# Altium PCB main.PcbDoc
Units mm, origin at the board's own origin, x right, y up, seen from the top; angles counter-clockwise.
Board outline 64.99 x 56 mm, 2 copper layers (Top Layer, Bottom Layer); 48 components, 52 nets, 256 pads, 78 vias.
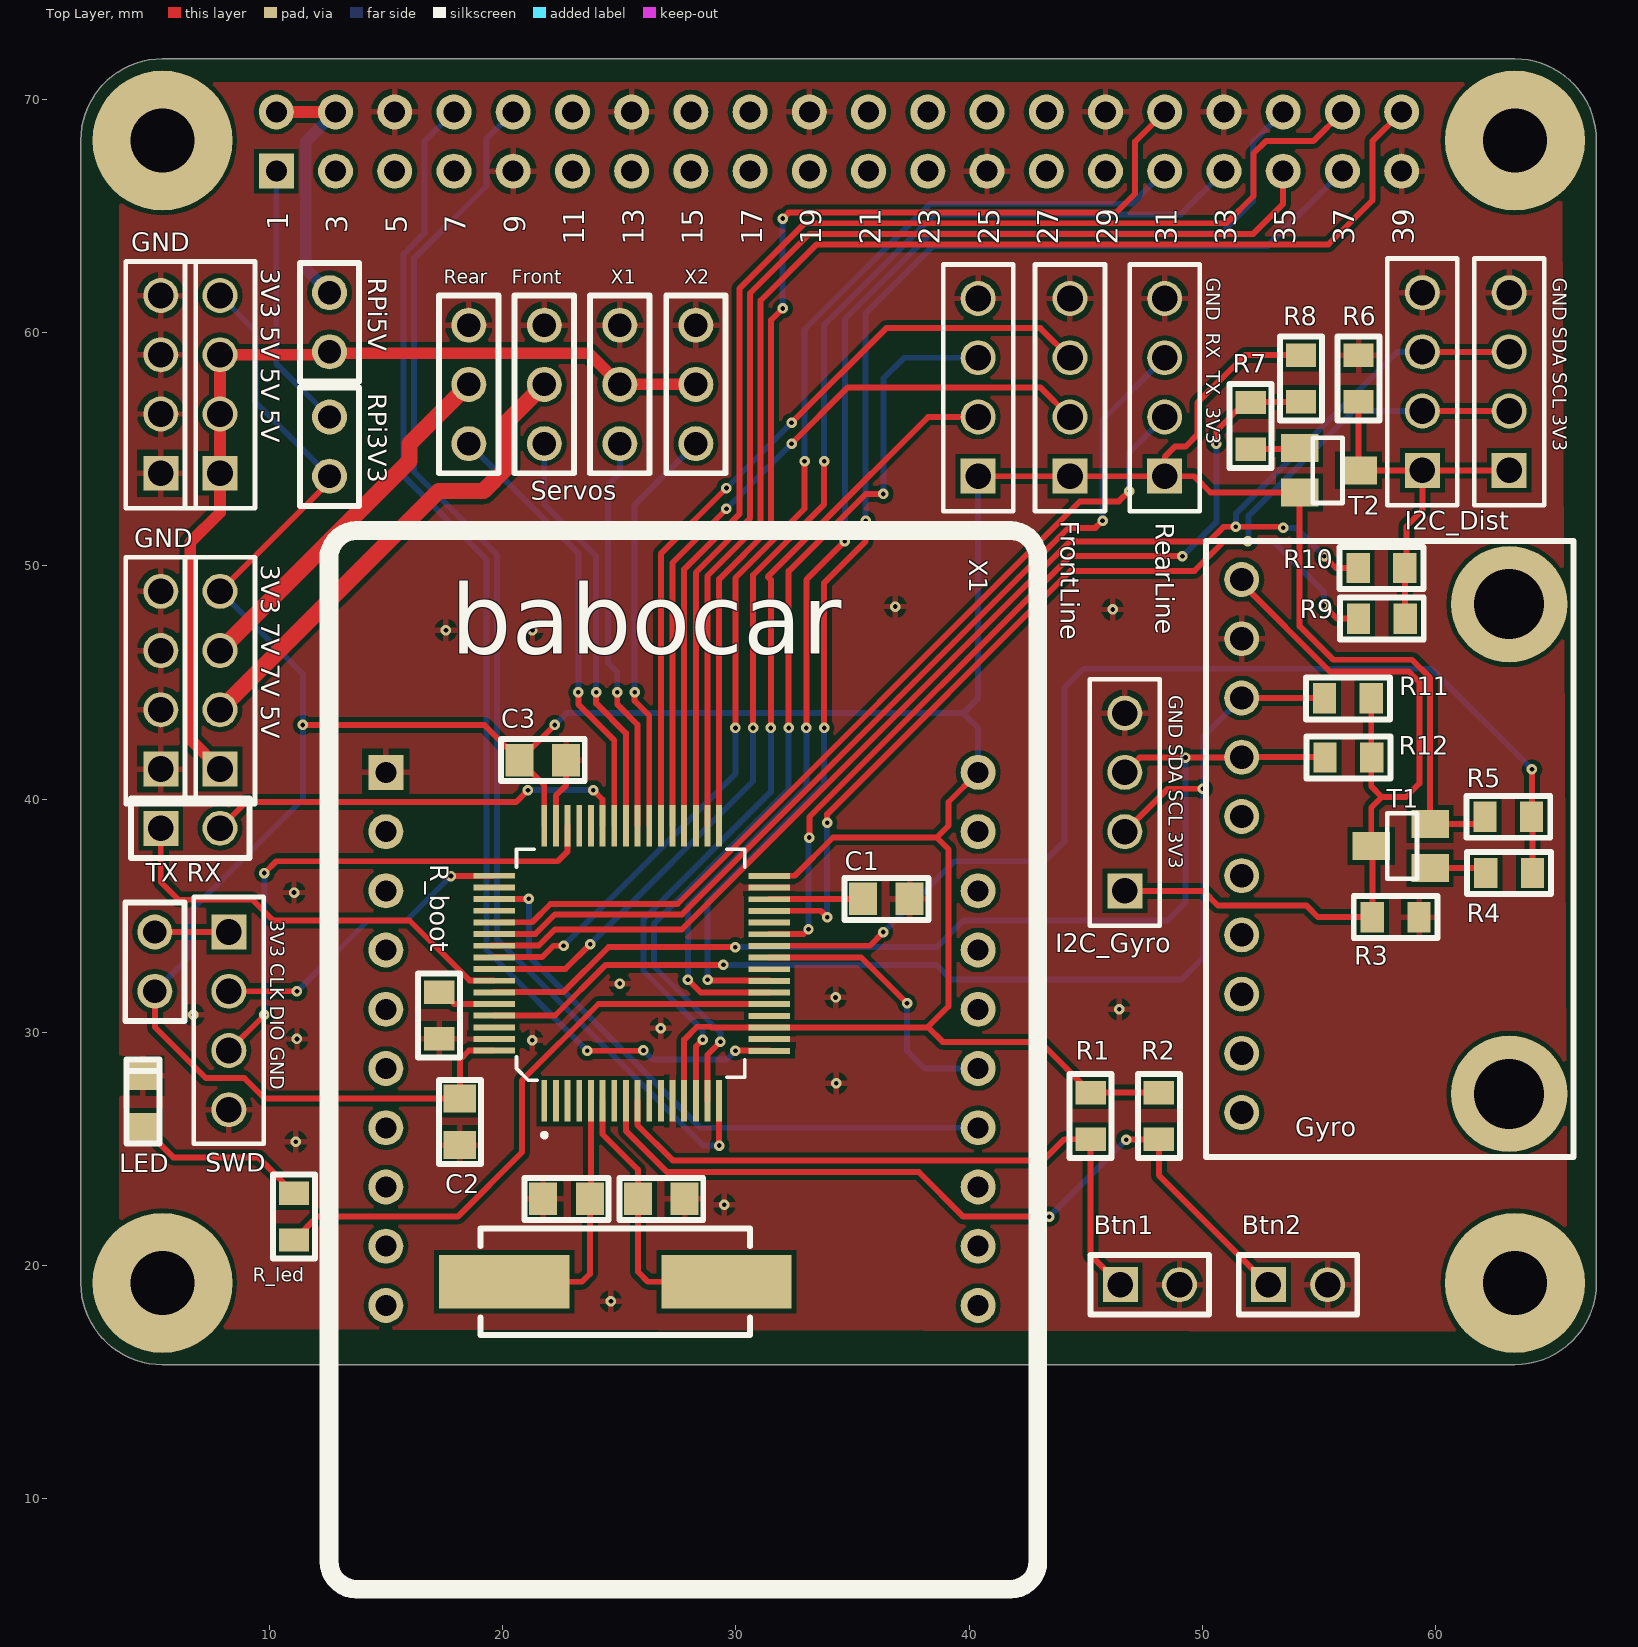
[diagram p0: Top Layer view]
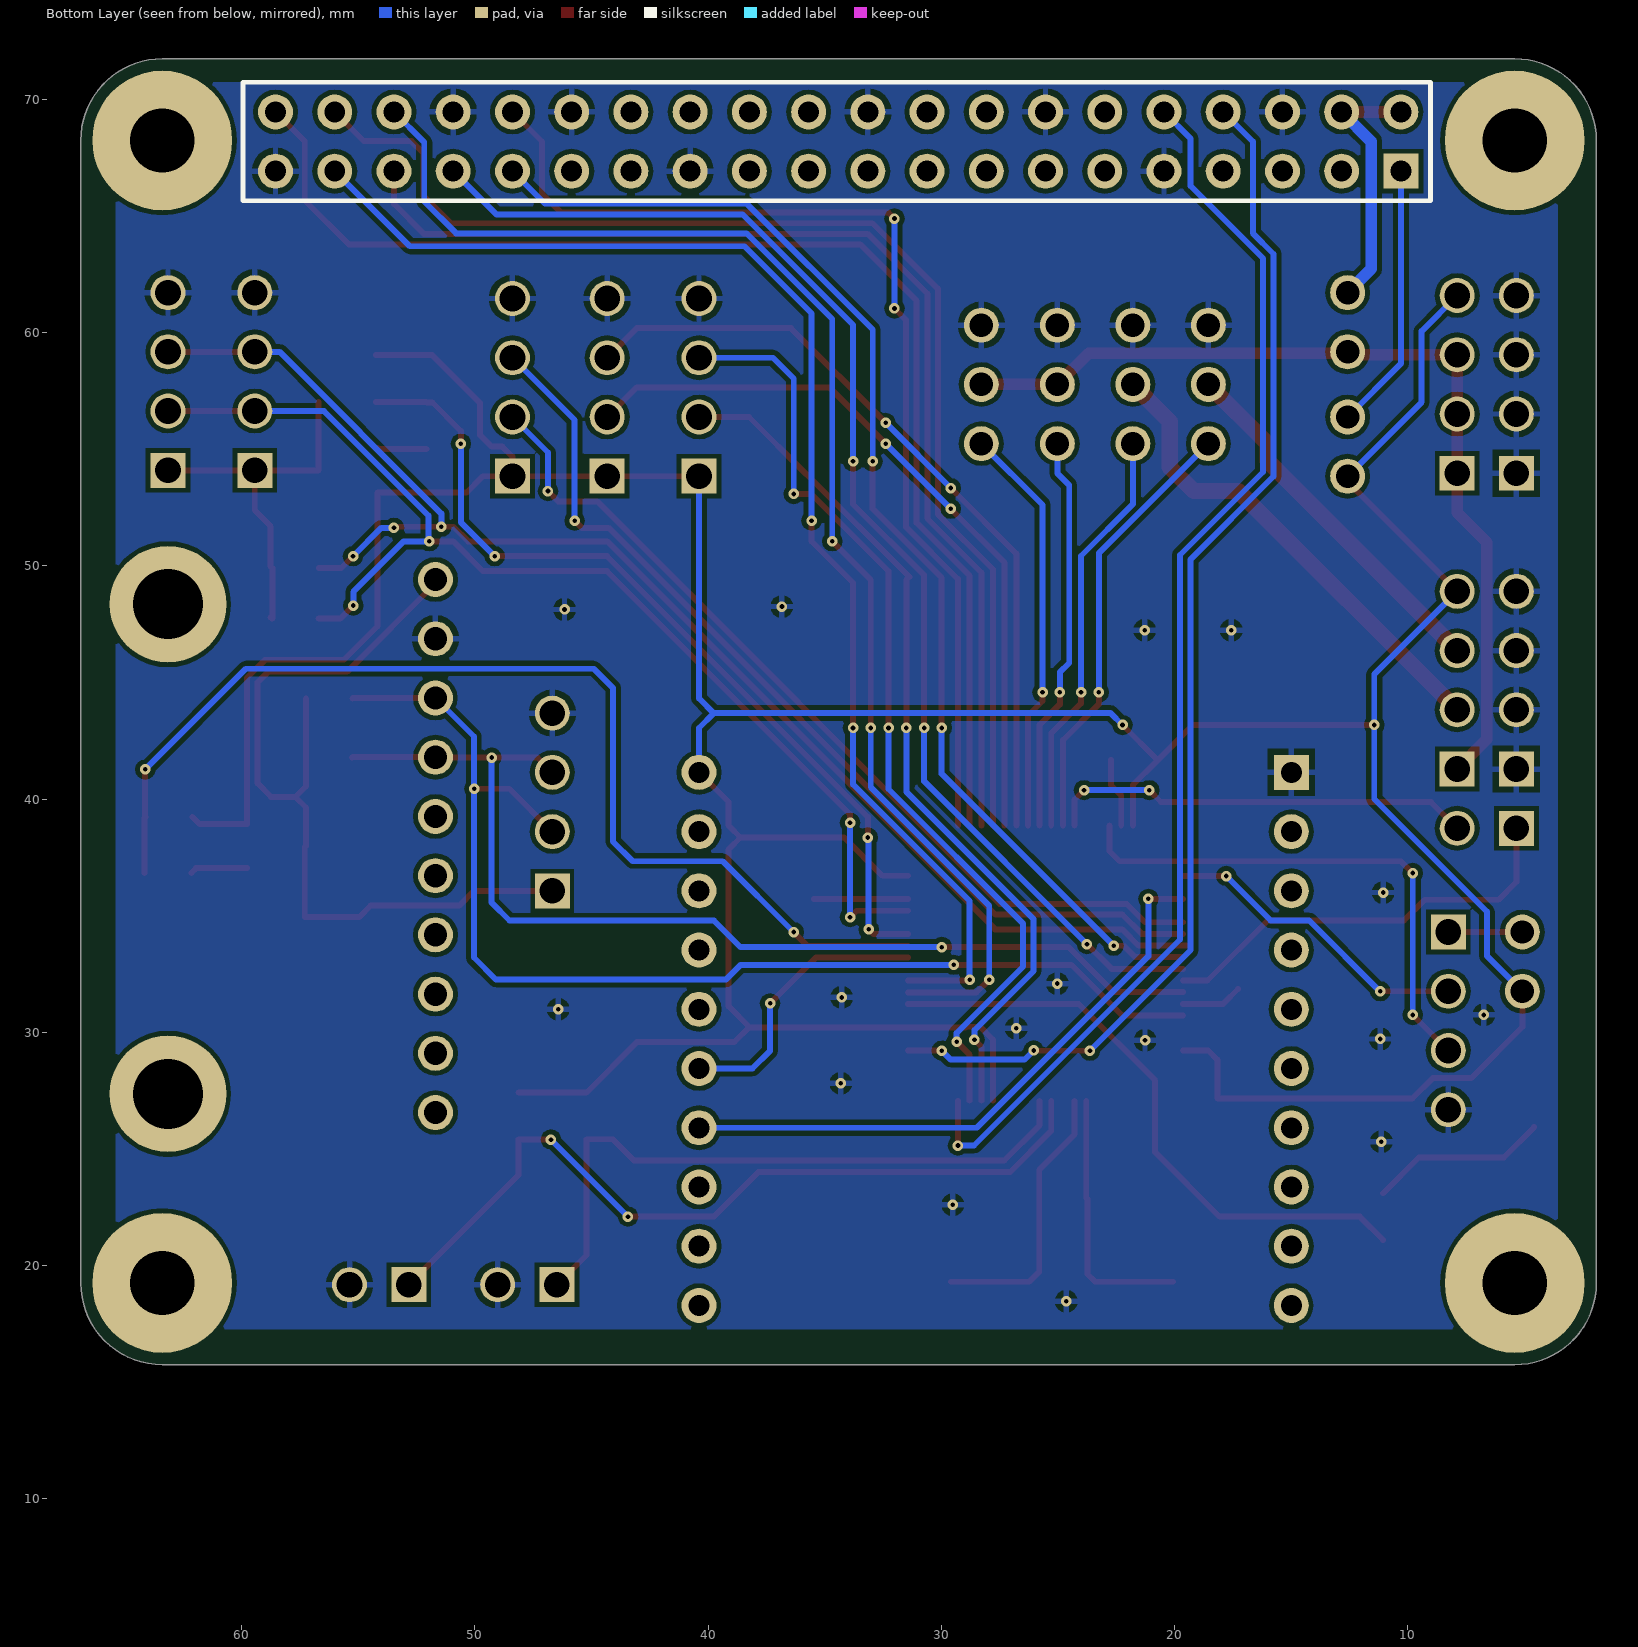
[diagram p1: Bottom Layer view, seen from below]

## Layer stack, top to bottom
Top Solder: solder mask 0.0102, Solder Resist, Dk 3.5
Top Layer: signal copper 0.0356
Dielectric 1: dielectric 0.32, FR-4, Dk 4.8
Bottom Layer: signal copper 0.0356
Bottom Solder: solder mask 0.0102, Solder Resist, Dk 3.5

## Board outline
1.905,19.248 1.905,68.248 cw(c5.405,68.248) 5.405,71.748 63.405,71.748 cw(c63.401,68.252) 66.897,68.248 66.897,19.248 cw(c63.401,19.244) 63.405,15.748 5.405,15.748 cw(c5.405,19.248)

## Design rules (kind name [scope] priority, off if disabled: settings)
Clearance [All] p1: gap=0.2 ignorepadtopadclearanceinfootprint=FALSE except(0: Arc-Text Arc-Hole Track-Text Track-Hole SMDPad-Text SMDPad-Hole THPad-Text THPad-Hole Via-Text Via-Hole Fill-Text Fill-Hole Poly-Text Poly-Hole Region-Text Region-Hole Text-Text Text-Hole; 0.1: Arc-SMDPad Track-SMDPad SMDPad-SMDPad)
ComponentClearance Gyro [HasFootprint('MPU9250')] p1: gap=0 collisioncheckmode=3 verticalgap=0 showdistances=FALSE
ComponentClearance RadioRecv [HasFootprint('FP_WES1000')] p2: gap=0 collisioncheckmode=3 verticalgap=0 showdistances=FALSE
ComponentClearance [All] p3: gap=0 collisioncheckmode=3 verticalgap=0 showdistances=FALSE
Height [All] p1 off: minheight=0 maxheight=25.4 prefheight=12.7
HoleSize [All] p1: absolutevalues=TRUE maxlimit=254 minlimit=0.025 maxpercent=80.000 minpercent=20.000
MinimumSolderMaskSliver [All] p1: minsoldermaskwidth=0
PolygonConnect [All] p1: connectstyle=Relief reliefconductorwidth=0.254 reliefentries=4 polygonreliefangle="90 Angle" airgapwidth=0.254
RoutingVias [All] p1: holewidth=0.2 width=0.45 viastyle="Through Hole" minholewidth=0.2 minwidth=0.45 maxholewidth=0.2 maxwidth=0.45
SilkToSilkClearance [All] p1: silktosilkclearance=0
SilkToSolderMaskClearance [IsPad] p1: minsilkscreentomaskgap=0 clearancetoexposedcopper=TRUE
SolderMaskExpansion [All] p1: expansion=0.102
Width [All] p1: maxlimit=1 minlimit=0.254 preferedwidth=0.254
24 further rules are at their usual default settings.

## Components (designator, comment, footprint, x,y, rotation, side; value= is the part's Value field where it differs from the comment)
1 "64-pin STM32F4 chip with symbol for Foxcar Control Board v1." LQFP64 25.527,32.96 r0 top
"3V3 5V 5V 5V" "4-Pin Header" "4-Pin Header" 7.874,53.975 r90 top (schematic designator J3)
*1 "JUMPER_2" JUMPER_2 5.08,33.032 r270 top
Btn1 "Connector" FP_CONN2_TUSKE_254MM 46.482,19.177 r270 top
Btn2 "Connector" FP_CONN2_TUSKE_254MM 52.832,19.177 r270 top
C1 "100nF" FP_0805_CAP_085 36.449,35.721 r180 top
C2 "100nF" FP_0805_CAP_085 18.161,26.162 r90 top
C3 "100nF" FP_0805_CAP_085 21.717,41.672 r180 top
C_quartz1 "22pF" FP_0805_CAP_085 22.733,22.86 r0 top
C_quartz2 "22pF" FP_0805_CAP_085 26.797,22.86 r180 top
Front "ServoMotor" Servo_motor 21.78,57.785 r90 top (schematic designator FrontServo)
FrontDist "4-Pin Header" "4-Pin Header" 63.158,54.102 r90 top
FrontLine "4-Pin Header" "4-Pin Header" 44.323,53.848 r90 top
Gyro "MPU9250" MPU9250 57.658,37.862 r0 top
I2C_Dist "4-Pin Header" "4-Pin Header" 59.436,54.102 r90 top
I2C_Gyro "4-Pin Header" "4-Pin Header" 46.677,36.068 r90 top (schematic designator I1)
J1 "4-Pin Header" "4-Pin Header" 7.874,41.291 r90 top
J2 "4-Pin Header" "4-Pin Header" 5.334,41.291 r90 top
J4 "4-Pin Header" "4-Pin Header" 5.334,53.975 r90 top
LED "LED Red" FP_0805_LED_RED 4.572,26.035 r90 top
MotorCtrl "Connector" FP_CONN2_TUSKE_254MM 5.334,38.751 r270 top
R1 "10K" FP_0805_RES 45.212,26.416 r90 top
R2 "10K" FP_0805_RES 48.133,26.416 r90 top
R3 "10K" FP_0805_RES 58.293,34.941 r0 top
R4 "120R" FP_0805_RES 63.158,36.83 r180 top
R5 "10K" FP_0805_RES 63.119,39.243 r0 top
R6 "10K" FP_0805_RES 56.699,58.039 r90 top
R7 "120R" FP_0805_RES 52.07,56.007 r270 top
R8 "10K" FP_0805_RES 54.229,58.039 r270 top
R9 "1K" FP_0805_RES 57.695,47.74 r0 top
R10 "1K" FP_0805_RES 57.682,49.911 r0 top
R11 "1K" FP_0805_RES 56.242,44.323 r0 top
R12 "1K" FP_0805_RES 56.261,41.783 r0 top
R_boot "10K" FP_0805_RES 17.272,30.721 r90 top
R_led "1K" FP_0805_RES 11.049,22.098 r90 top
Rear "ServoMotor" Servo_motor 18.542,57.785 r90 top (schematic designator RearServo)
RearLine "4-Pin Header" "4-Pin Header" 48.387,53.848 r90 top
Recv "SiLabs_Thunderboard_Sense2" SiLabs_Thunderbird_Sense2 27.94,28.448 r0 top
RPi "RPI GPIO Connector" rpi 34.417,68.199 r180 top
RPi3V3 "" JUMPER_2 12.573,55.118 r90 top
RPi5V "" JUMPER_2 12.573,60.452 r270 top
SWD "4-Pin Header" "4-Pin Header" 8.255,34.302 r270 top
T1 "pMOS" FP_SOT23-3 58.569,37.989 r0 top
T2 "pMOS" FP_SOT23-3 55.372,54.102 r180 top
X1 "8MHz" FP_CRYSTAL_HC49_SMD 20.066,19.304 r0 top
X1 "4-Pin Header" "4-Pin Header" 40.386,53.848 r90 top (schematic designator UartX1)
X1 "ServoMotor" Servo_motor 25.019,57.785 r90 top (schematic designator ServoX1)
X2 "ServoMotor" Servo_motor 28.28,57.785 r90 top (schematic designator ServoX2)

## Footprints (in the part's own frame and the unit in brackets; to place one, negate y for a bottom-side part, rotate by r counter-clockwise, add the part's x,y. Pads: shape width x height; smd on the part's side, far side on the other; paste and mask are expansions set on the pad)
"4-Pin Header" [mm]
  rect 1.5x1.5 hole 1.1 mask+0.035: 1(0,0)
  round 1.5 hole 1.1 mask+0.035: 2(2.54,0) 3(5.08,0) 4(7.62,0)
  silkscreen extent -1.5,-1.5 9.08,1.5, body extent -1.27,-1.24 8.89,1.25, height 8.54
FP_0805_CAP_085 [mm] "0805 kapacitás YAGEO 0.85mm magas"
  rect 1.2x1.4 smd: 1(-1,0) 2(1,0)
  silkscreen extent -1.8,-0.9 1.8,0.9, body extent -1,-0.64 1.03,0.64, height 0.85
FP_0805_LED_RED [mm] "0805 méretû piros LED"
  rect 1.2x1.3 smd: A(-0.1,0) K(2.1,0)
  silkscreen extent -0.8,-0.7 2.8,0.7, body extent 0.01,-0.63 2.03,0.62, height 1.1
FP_0805_RES [mm] "0805 ellenállás"
  rect 1x1.3 smd: 1(-1,0) 2(1,0)
  silkscreen extent -1.8,-0.9 1.8,0.9, body extent -1,-0.62 1,0.63, height 0.62
FP_CONN2_TUSKE_254MM [mm] "2×1 tüskesor"
  rect 1.5x1.5 hole 1.1: 1(0,0)
  round 1.5 hole 1.1: 2(0,2.54)
  silkscreen extent -1.27,-1.27 1.27,3.81, body extent -1.27,-1.27 1.27,3.81, height 8.54
FP_CRYSTAL_HC49_SMD [mil] "HC49/SMD"
  rect 220x90 smd: 1(0,0) 2(375,0)
  silkscreen extent -40,-90 415,90, body extent -57,-90 432,90, height 130
FP_SOT23-3 [mm] "SOT23-3 tok"
  rect 1.6x1.2 smd: 1(1.2,-0.95) 2(1.2,0.95) 3(-1.327,0)
  silkscreen extent -0.64,-1.4 0.64,1.4, body extent -1.27,-1.46 1.27,1.46, height 0.97
JUMPER_2 [mm]
  round 1.5 hole 1: 1(-1.27,0) 2(1.27,0)
  silkscreen extent -2.54,-1.27 2.54,1.27
LQFP64 [mil]
  rect 10x70 smd: 1(-147.5,-232.34) 2(-127.82,-232.34) 3(-108.13,-232.34) 4(-88.45,-232.34) 5(-68.76,-232.34) 6(-49.08,-232.34) 7(-29.39,-232.34) 8(-9.71,-232.34) 9(9.98,-232.34) 10(29.66,-232.34) 11(49.35,-232.34) 12(69.03,-232.34) 13(88.72,-232.34) 14(108.4,-232.34) 15(128.09,-232.34) 16(147.77,-232.34) 33(147.77,232.34) 34(128.09,232.34) 35(108.4,232.34) 36(88.72,232.34) 37(69.03,232.34) 38(49.35,232.34) 39(29.66,232.34) 40(9.98,232.34) 41(-9.71,232.34) 42(-29.39,232.34) 43(-49.08,232.34) 44(-68.76,232.34) 45(-88.45,232.34) 46(-108.13,232.34) 47(-127.82,232.34) 48(-147.5,232.34)
  rect 70x10 smd: 17(232.34,-147.77) 18(232.34,-128.09) 19(232.34,-108.4) 20(232.34,-88.72) 21(232.34,-69.03) 22(232.34,-49.35) 23(232.34,-29.66) 24(232.34,-9.98) 25(232.34,9.71) 26(232.34,29.39) 27(232.34,49.08) 28(232.34,68.76) 29(232.34,88.45) 30(232.34,108.13) 31(232.34,127.82) 32(232.34,147.5) 49(-232.34,147.78) 50(-232.34,128.09) 51(-232.34,108.41) 52(-232.34,88.72) 53(-232.34,69.04) 54(-232.34,49.35) 55(-232.34,29.67) 56(-232.34,9.98) 57(-232.34,-9.7) 58(-232.34,-29.39) 59(-232.34,-49.07) 60(-232.34,-68.76) 61(-232.34,-88.44) 62(-232.34,-108.13) 63(-232.34,-127.81) 64(-232.34,-147.5)
  silkscreen extent -194,-292 191,193
MPU9250 [mm]
  round 5 hole 3: 0(5.5,-10.5) 0(5.5,10.5)
  round 1.5 hole 1: ADO(-5.969,-3.683) ECL(-5.969,-1.143) EDA(-5.969,1.397) FSYNC(-5.969,-11.303) GND(-5.969,9.017) INT(-5.969,-6.223) NCS(-5.969,-8.763) SCL(-5.969,6.477) SDA(-5.969,3.937) VCC(-5.969,11.557)
  silkscreen extent -7.5,-13.21 8.25,13.21
rpi [mm]
  rect 1.5x1.5 hole 0.9: 1(24.13,1.27)
  round 1.5 hole 0.9: 2(24.13,-1.27) 3(21.59,1.27) 4(21.59,-1.27) 5(19.05,1.27) 6(19.05,-1.27) 7(16.51,1.27) 8(16.51,-1.27) 9(13.97,1.27) 10(13.97,-1.27) 11(11.43,1.27) 12(11.43,-1.27) 13(8.89,1.27) 14(8.89,-1.27) 15(6.35,1.27) 16(6.35,-1.27) 17(3.81,1.27) 18(3.81,-1.27) 19(1.27,1.27) 20(1.27,-1.27) 21(-1.27,1.27) 22(-1.27,-1.27) 23(-3.81,1.27) 24(-3.81,-1.27) 25(-6.35,1.27) 26(-6.35,-1.27) 27(-8.89,1.27) 28(-8.89,-1.27) 29(-11.43,1.27) 30(-11.43,-1.27) 31(-13.97,1.27) 32(-13.97,-1.27) 33(-16.51,1.27) 34(-16.51,-1.27) 35(-19.05,1.27) 36(-19.05,-1.27) 37(-21.59,1.27) 38(-21.59,-1.27) 39(-24.13,1.27) 40(-24.13,-1.27)
  body extent -25.52,-2.63 25.53,2.38, height 8.5
Servo_motor [mm]
  round 1.5 hole 1: Ctrl(-2.54,0) GND(2.54,0) Vcc(0,0)
  silkscreen extent -3.81,-1.27 3.81,1.27
SiLabs_Thunderbird_Sense2 [mm]
  rect 1.5x1.5 hole 0.9: 1(-12.954,12.7)
  round 1.5 hole 0.9: 2(12.446,12.7) 3(-12.954,10.16) 4(12.446,10.16) 5(-12.954,7.62) 6(12.446,7.62) 7(-12.954,5.08) 8(12.446,5.08) 9(-12.954,2.54) 10(12.446,2.54) 11(-12.954,0) 12(12.446,0) 13(-12.954,-2.54) 14(12.446,-2.54) 15(-12.954,-5.08) 16(12.446,-5.08) 17(-12.954,-7.62) 18(12.446,-7.62) 19(-12.954,-10.16) 20(12.446,-10.16)
  silkscreen extent -15.39,-22.33 15.01,23.07

## Part data
1: library part STM32F4R_64PIN_FOXCAR, Package=LQFP64, DeviceSetName=STM32F4R_64PIN_FOXCAR, GateName_1=G$1, LibraryName=stm32f4, SymbolName_1=STM32F4_64PINS_FOXCARV1
Btn1 Btn2 MotorCtrl: library part Connector_2pin, "2pin connector"
C1 C2 C3: library part "CAP 100nF", "Capacitor", Tolerance=+80%/-20%, Voltage=25V, Name="SMD Multilayer Ceramic Capacitor, 0805", Reference=1759167, Supplier=Farnell
C_quartz1 C_quartz2: library part "CAP 22pF", "Capacitor", Tolerance=5%, Voltage=50V, Name="SMD Multilayer Ceramic Capacitor, 0805", Reference=1759195, Supplier=Farnell
Front Rear X1 X2: "Servo motor", Name="MG996R servo motor", Reference=201606181242, Supplier=eBay
LED: "Red LED", I_max=20mA, Name="MULTICOMP  MCL-S270SRC  LED, Red, SMD, 1.25mm x 1.4mm, 20 mA, 1.85 V, 643 nm", Reference=1581239, Supplier=Farnell, U_fw=1.85V, Wavelength=643nm
R1 R2 R3 R5 R6 R8 R_boot: library part "RES 10K", "Resistor", Power=125mW, Tolerance=5%, Name="YAGEO (PHYCOMP)  RC0805JR-0710KL  SMD Chip Resistor, Thick Film, 10 kohm", Reference=9234136, Supplier=Farnell
R4 R7: library part "RES 120R", "Resistor", Power=125mW, Tolerance=5%, Name="YAGEO (PHYCOMP)  RC0805JR-07120RL  SMD Chip Resistor, Thick Film, 120 ohm", Reference=9233890, Supplier=Farnell
R9 R10 R11 R12 R_led: library part "RES 1K", "Resistor", Power=125mW, Tolerance=5%, Name="YAGEO (PHYCOMP)  RC0805JR-071KL  SMD Chip Resistor, Thick Film, 1 kohm", Reference=9234004, Supplier=Farnell
Recv: "Radio transmitter/receiver"
RPi: library part "rpi connector", "GPIO Header for Raspberry Pi A+/B+/Pi 2/Pi 3 - 2x20", Manufacturer="SparkFun Electronics", Manufacturer Part Number=PRT-14017, Supplier Part Number 1=1568-1462-ND, Accessory Type=Connector, Category="Development Boards, Kits, Programmers", ComponentLink1Description=https://cdn.sparkfun.com/datasheets/Dev/RaspberryPi/12313.pdf, ComponentLink1URL=https://cdn.sparkfun.com/datasheets/Dev/RaspberryPi/12313.pdf, For Use With/Related Products="Raspberry Pi", Nils Minor=author, nilsminor@web.de=mail, Part Status=Active, Pricing 1="1=1.84 (EUR)", RoHS="RoHS Compliant", Stock 1=150, Supplier 1=Digi-Key
RPi3V3 RPi5V: library part JUMPER_2
T1 T2: "pMOS FET", Name="BSS84 pMOS FET", Reference=1094997, Supplier=Farnell
X1: library part Crystal, "Quarz Crystal"

## Free pads (board coordinates)
  round 6 hole 2.75: ""(5.405,19.248) ""(5.405,68.248) ""(63.405,19.248) ""(63.405,68.248)

## Via types
v1: diameter 0.45, hole 0.2, Top Layer to Bottom Layer, 78 vias

## Nets (pads, with @x,y where several pads share a name; then routed paths per layer and width w, separated by ;. In a path a pad name is that pad's centre, name@x,y a point inside that pad or via, vN(x,y) a via of type N, cw(c..) or ccw(c..) an arc to the next point about the centre after c; other vN are vias at no path point)
3V3: 1.13 1.19 1.32 1.48 1.64 "3V3 5V 5V 5V.4" *1.2 C2.2 C3.2 FrontLine.1 J1.4 R1.2 R2.2 R5.1 R8.1 RearLine.1 Recv.2 RPi3V3.1 T1.2 T2.2 X1.1@40.386,53.848 | length 192.1
  Top Layer w0.254: *1.2 5.08,30.226 7.27,28.036 8.921,28.036 9.795,27.162 C2.2 18.161,28.829 18.554,29.222 1.64@19.625,29.222 ; J1.4 12.573,53.61 RPi3V3.1 ; v1(11.43,43.18) 19.209,43.18 C3.2 ; 1.48@21.78,38.869 21.78,40.608 C3.2 ; v1(22.225,43.18) C3.2 ; 1.13@27.78,27.067 27.78,29.689 28.332,30.241 28.93,30.241 28.956,30.215 38.216,30.215 ; 1.32@31.428,36.715 32.524,36.715 34.163,38.354 38.608,38.354 ; Recv.2 39.116,39.878 39.116,38.862 38.608,38.354 ; X1.1@40.386,53.848 FrontLine.1 RearLine.1 ; R2.2 R1.2 43.037,29.591 38.862,29.591 38.238,30.215 ; R8.1 51.829,59.039 49.784,56.994 49.784,55.625 49.277,55.118 48.82,55.118 48.387,54.685 RearLine.1 ; R5.1 61.815,38.939 T1.2 59.769,45.201 58.994,45.976 55.607,45.976 54.172,47.411 T2.2 50.353,53.152 49.657,53.848 RearLine.1 ; 38.216,30.215 38.227,30.226 ; 38.216,30.215 38.227,30.215 ; 38.227,30.215 38.238,30.215 ; 38.227,30.215 38.227,30.226 ; 38.227,30.226 39.116,31.115 39.116,37.846 38.608,38.354 ; 38.227,30.226 38.238,30.215
  Bottom Layer w0.254: *1.2 6.604,33.286 6.604,35.179 11.43,40.005 v1(11.43,43.18) 11.43,45.355 J1.4 ; 7.874,61.595 9.398,60.071 9.398,57.023 RPi3V3.1 ; v1(22.225,43.18) 22.733,43.688 39.751,43.688 ; Recv.2 40.386,43.053 39.751,43.688 ; X1.1@40.386,53.848 40.386,44.323 39.751,43.688
3V3_Dist: FrontDist.1 I2C_Dist.1 R6.1 R9.2 R10.2 T2.3 | length 16.2
  Top Layer w0.254: R6.1 T2.3 I2C_Dist.1 ; R9.2@58.753,47.798 R9.2 58.682,47.753 R10.2 58.753,49.983 58.753,51.701 59.436,52.383 I2C_Dist.1 ; FrontDist.1 I2C_Dist.1
3V3_En_Dist: 1.27 R7.1 R8.2 | length 37.4
  Top Layer w0.254: 1.27@31.428,34.215 32.909,34.215 v1(33.111,34.417) ; v1(33.147,38.354) 33.147,39.236 44.33,50.419 v1(49.149,50.419) ; v1(50.598,55.245) 50.598,55.787 51.818,57.007 R7.1 52.102,57.039 R8.2
  Bottom Layer w0.254: v1(33.111,34.417) 33.111,38.318 v1(33.147,38.354) ; v1(49.149,50.419) 50.598,51.868 v1(50.598,55.245)
3V3_En_Gyro: 1.26 R4.1 R5.2 | length 47.7
  Top Layer w0.254: 1.26@31.428,33.715 35.747,33.715 36.322,34.29 v1(36.322,34.302) ; v1(64.135,41.275) 64.135,39.259 R5.2 64.158,39.204 R4.1
  Bottom Layer w0.254: v1(36.322,34.302) 36.334,34.302 39.37,37.338 43.232,37.338 44.081,38.187 44.081,44.774 44.9,45.593 59.817,45.593 v1(64.135,41.275)
3V3_Gyro: Gyro.VCC I2C_Gyro.1 R3.1 R11.2 R12.2 T1.3 | length 36.6
  Top Layer w0.254: I2C_Gyro.1 50.038,36.068 50.673,35.433 54.471,35.433 54.963,34.941 R3.1 57.293,37.938 T1.3 57.242,39.642 57.695,40.095 ; Gyro.VCC 51.689,49.252 55.475,45.466 58.862,45.466 59.315,45.013 59.315,40.675 58.735,40.095 57.695,40.095 ; R11.2 57.242,41.673 57.242,40.548 57.695,40.095
5V: "3V3 5V 5V 5V.1" "3V3 5V 5V 5V.2" "3V3 5V 5V 5V.3" J1.1 RPi5V.2 X1.Vcc X2.Vcc | length 39.9
  Top Layer w0.5: J1.1 6.604,42.561 6.604,51.011 7.874,52.281 7.874,53.975 7.874,56.515 7.874,59.055 12.446,59.055 RPi5V.2 12.63,59.125 23.679,59.125 X1.Vcc X2.Vcc
7V_1: Front.Vcc J1.2 | length 20.8
  Top Layer w0.7: J1.2 17.256,53.213 19.177,53.213 20.193,54.229 20.193,56.198 Front.Vcc
7V_2: J1.3 Rear.Vcc | length 15.8
  Top Layer w0.7: J1.3 16.002,54.499 16.002,55.245 Rear.Vcc
Debug_RX: 1.17 RPi.8 | length 52.5
  Top Layer w0.254: v1(23.622,29.21) 26.023,29.21 v1(26.035,29.222) ; v1(29.979,29.215) 1.17@31.428,29.215
  Bottom Layer w0.254: RPi.8 16.637,68.199 16.637,64.269 15.748,63.38 15.748,53.841 19.304,50.285 19.304,33.528 v1(23.622,29.21) ; v1(26.035,29.222) 26.428,28.829 29.593,28.829 v1(29.979,29.215)
Debug_TX: 1.16 RPi.10 | length 53.8
  Top Layer w0.254: v1(29.28,25.146) 1.16@29.28,27.067
  Bottom Layer w0.254: RPi.10 19.304,68.326 19.304,66.294 16.202,63.192 16.202,54.029 19.758,50.473 19.758,33.979 28.591,25.146 v1(29.28,25.146)
Dist_SCL: 1.29 FrontDist.2 I2C_Dist.2 R9.1 | length 50.5
  Top Layer w0.254: 1.29@31.428,35.215 33.635,35.215 v1(33.909,34.941) ; v1(33.909,38.989) 33.909,39.356 44.337,49.784 49.657,49.784 50.927,51.054 v1(51.95,51.054) ; v1(55.211,48.302) 55.773,47.74 R9.1 ; I2C_Dist.2 FrontDist.2
  Bottom Layer w0.254: v1(33.909,34.941) v1(33.909,38.989) ; v1(55.211,48.302) 55.211,48.89 53.047,51.054 v1(51.95,51.054) 51.987,51.091 51.987,52.155 56.474,56.642 I2C_Dist.2
Dist_SDA: 1.55 FrontDist.3 I2C_Dist.3 R10.1 | length 60.5
  Top Layer w0.254: 1.55@19.492,33.721 19.625,33.721 21.544,33.721 22.239,34.417 27.686,34.417 44.323,51.054 50.285,51.054 50.913,51.682 v1(51.435,51.682) 53.42,51.682 v1(53.467,51.635) ; v1(55.222,50.419) 55.73,49.911 R10.1 ; I2C_Dist.3 FrontDist.3
  Bottom Layer w0.254: v1(51.435,51.682) 51.435,52.245 58.372,59.182 I2C_Dist.3 ; v1(53.467,51.635) 54.006,51.635 v1(55.222,50.419)
FrontLine_RX: 1.38 FrontLine.3 | length 33.7
  Top Layer w0.254: 1.38@26.78,38.87 26.78,50.529 v1(29.591,53.34) ; v1(32.385,56.134) 36.449,60.198 43.053,60.198 FrontLine.3
  Bottom Layer w0.254: v1(29.591,53.34) v1(32.385,56.134)
FrontLine_TX: 1.37 FrontLine.2 | length 32
  Top Layer w0.254: 1.37@27.28,38.87 27.28,50.133 29.591,52.444 v1(29.591,52.451) ; v1(32.385,55.245) 34.798,57.658 43.053,57.658 FrontLine.2
  Bottom Layer w0.254: v1(29.591,52.451) v1(32.385,55.245)
FrontServo_Ctrl: 1.41 Front.Ctrl | length 17.8
  Top Layer w0.254: v1(24.003,44.577) 24.003,44.108 25.28,42.831 1.41@25.28,38.87
  Bottom Layer w0.254: Front.Ctrl 21.78,52.649 24.003,50.426 v1(24.003,44.577)
GND: 1.12 1.18 1.31 1.47 1.63 Btn1.2 Btn2.2 C1.1 C2.1 C3.1 C_quartz1.1 C_quartz2.1 Front.GND FrontDist.4 FrontLine.4 Gyro.GND I2C_Dist.4 I2C_Gyro.4 J2.1 J2.2 J2.3 J2.4 J4.1 J4.2 J4.3 J4.4 LED.K R3.2 R6.2 R_boot.1 Rear.GND RearLine.4 Recv.1 RPi.6 RPi.9 RPi.14 RPi.20 RPi.25 RPi.30 RPi.34 RPi.39 SWD.4 X1.4 X1.GND X2.GND | length 3
  Top Layer w0.254: 1.47@22.28,38.87 22.28,40.165 22.717,40.602 C3.1
  other v1: 24.638,18.461 29.503,22.606 11.124,25.312 34.301,27.813 21.259,29.655 11.176,29.715 26.78,30.18 6.731,30.746 46.43,30.988 34.271,31.496 25.019,32.092 11.049,35.995 17.564,47.244 21.274,47.244 46.153,48.133 36.83,48.26
GpioX0: 1.56 RPi.31 | length 52.2
  Top Layer w0.254: 1.56@19.625,33.221 21.686,33.221 22.179,33.715 v1(22.606,33.715) ; v1(29.979,43.053) 29.979,49.49 32.942,52.453 v1(32.942,54.483)
  Bottom Layer w0.254: v1(22.606,33.715) 29.979,41.087 v1(29.979,43.053) ; v1(32.942,54.483) 32.937,54.488 32.937,60.137 38.332,65.532 46.99,65.532 RPi.31
GpioX1: 1.57 RPi.33 | length 55.2
  Top Layer w0.254: 1.57@19.625,32.721 22.688,32.721 v1(23.749,33.782) ; v1(30.734,43.053) 30.734,49.603 33.782,52.651 v1(33.782,54.483)
  Bottom Layer w0.254: v1(23.749,33.782) 30.734,40.767 v1(30.734,43.053) ; v1(33.782,54.483) 33.782,60.34 38.52,65.078 49.076,65.078 RPi.33
GpioX2: 1.22 RPi.36 | length 58.8
  Top Layer w0.254: v1(27.94,32.258) 28.492,31.706 31.42,31.706 1.22@31.428,31.715 ; v1(33.02,43.053) 33.02,49.403 v1(34.671,51.054)
  Bottom Layer w0.254: v1(27.94,32.258) 27.94,35.433 33.02,40.513 v1(33.02,43.053) ; v1(34.671,51.054) 34.671,60.587 38.346,64.262 50.8,64.262 52.168,65.63 52.168,68.17 RPi.36
GpioX3: 1.23 RPi.37 | length 57
  Top Layer w0.254: v1(28.78,32.258) 28.824,32.215 1.23@31.428,32.215 ; v1(33.782,43.053) 33.782,49.276 35.56,51.054 v1(35.56,51.943)
  Bottom Layer w0.254: v1(28.78,32.258) 28.78,35.631 33.782,40.633 v1(33.782,43.053) ; v1(35.56,51.943) 35.56,60.834 38.436,63.71 52.788,63.71 RPi.37
GpioX4: 1.33 RPi.32 | length 46.8
  Top Layer w0.254: 1.33@29.28,38.87 29.28,49.434 31.505,51.658 31.505,60.542 v1(32.004,61.041) ; v1(32.004,64.897) 32.258,65.151 46.297,65.151 47.117,65.971 47.117,68.199 RPi.32
  Bottom Layer w0.254: v1(32.004,61.041) 31.985,61.06 32.004,61.08 v1(32.004,64.897)
GpioX5: 1.34 RPi.40 | length 55.8
  Top Layer w0.254: 1.34@28.78,38.87 28.78,49.576 31.051,51.846 31.051,61.375 33.465,63.789 55.408,63.789 57.293,65.674 57.293,68.215 RPi.40
GpioX6: 1.35 RPi.35 | length 49.6
  Top Layer w0.254: 1.35@28.28,38.87 28.28,49.718 30.597,52.034 30.597,61.683 33.157,64.243 52.184,64.243 53.467,65.526 RPi.35
GpioX7: 1.36 RPi.38 | length 54.1
  Top Layer w0.254: 1.36@27.78,38.87 27.78,49.86 30.143,52.222 30.143,61.893 32.947,64.697 51.027,64.697 52.197,65.867 52.197,67.691 52.721,68.215 54.753,68.215 RPi.38
Gyro_SCL: 1.61 Gyro.SCL I2C_Gyro.2 R11.1 | length 51.4
  Top Layer w0.254: 1.61@19.625,30.721 22.243,30.721 24.415,32.893 v1(29.464,32.893) ; I2C_Gyro.2 48.514,40.445 v1(50.018,40.445) ; Gyro.SCL 55.226,44.339 R11.1
  Bottom Layer w0.254: v1(29.464,32.893) 38.601,32.893 39.236,32.258 49.09,32.258 50.038,33.206 50.038,42.688 Gyro.SCL
Gyro_SDA: 1.59 Gyro.SDA I2C_Gyro.3 R12.1 | length 46.3
  Top Layer w0.254: 1.59@19.625,31.721 22.601,31.721 24.534,33.655 v1(29.972,33.655) ; I2C_Gyro.3 47.312,41.783 v1(49.276,41.783) 51.673,41.783 Gyro.SDA 55.245,41.799 R12.1
  Bottom Layer w0.254: v1(29.972,33.655) 38.608,33.655 39.751,34.798 48.514,34.798 49.276,35.56 v1(49.276,41.783)
MotorCtrl_RX: 1.43 MotorCtrl.2 | length 18.4
  Top Layer w0.254: MotorCtrl.2 9.001,39.878 20.574,39.878 v1(21.082,40.386) ; v1(23.876,40.386) 24.28,39.982 1.43@24.28,38.87
  Bottom Layer w0.254: v1(21.082,40.386) v1(23.876,40.386)
MotorCtrl_TX: 1.58 MotorCtrl.1 | length 18.3
  Top Layer w0.254: MotorCtrl.1 5.334,36.449 6.096,35.687 9.271,35.687 10.16,34.798 16.002,34.798 18.579,32.221 1.58@19.625,32.221
Net1_5: 1.5 C_quartz1.2 X1.1@20.066,19.304 | length 11.3
  Top Layer w0.254: X1.1@20.066,19.304 23.399,19.304 23.733,19.638 C_quartz1.2 23.78,22.907 1.5@23.78,27.067
Net1_6: 1.6 C_quartz2.2 X1.2@29.591,19.304 | length 11.9
  Top Layer w0.254: 1.6@24.28,27.067 24.28,25.631 25.797,24.114 C_quartz2.2 25.797,19.731 26.224,19.304 X1.2@29.591,19.304
Net1_8: 1.8 Btn2.1 R2.1 | length 35.2
  Top Layer w0.254: 1.8@25.28,27.067 25.28,25.774 27.051,24.003 37.846,24.003 39.751,22.098 v1(43.434,22.098) ; v1(46.736,25.4) 48.117,25.4 R2.1 48.133,23.876 Btn2.1
  Bottom Layer w0.254: v1(43.434,22.098) v1(46.736,25.4)
Net1_9: 1.9 Btn1.1 R1.1 | length 28.2
  Top Layer w0.254: 1.9@25.78,27.067 25.78,26.019 27.288,24.511 43.18,24.511 44.085,25.416 R1.1 45.212,20.447 Btn1.1
Net1_21: 1.21 R_led.1 | length 26.4
  Top Layer w0.254: R_led.1 12.049,22.098 18.066,22.098 20.828,24.86 20.828,27.94 24.103,31.215 1.21@31.428,31.215
Net1_30: 1.30 C1.2 | length 4
  Top Layer w0.254: 1.30@31.428,35.715 35.442,35.715 C1.2
Net1_60: 1.60 R_boot.2 | length 2.6
  Top Layer w0.254: R_boot.2@17.272,31.861 17.912,31.221 1.60@19.625,31.221
Net*1_1: *1.1 SWD.1 | length 3.2
  Top Layer w0.254: *1.1 SWD.1
NetLED_1: LED.A R_led.2 | length 7.7
  Top Layer w0.254: LED.A 5.869,24.638 9.509,24.638 R_led.2
NetR4_2: R4.2 T1.1 | length 2.5
  Top Layer w0.254: T1.1 61.949,37.039 R4.2
NetR7_2: R7.2 T2.1 | length 2.1
  Top Layer w0.254: R7.2 54.127,55.007 T2.1
NetRPi3V3_2: RPi3V3.2 RPi.1 | length 11.5
  Bottom Layer w0.254: RPi.1 10.287,58.674 RPi3V3.2
NetRPi5V_1: RPi5V.1 RPi.2 RPi.4 | length 11.2
  Top Layer w0.5: RPi.2 RPi.4
  Bottom Layer w0.5: RPi5V.1 11.557,62.738 11.557,68.199 RPi.4
RadioRecv_RX: 1.25 Recv.12 | length 12.1
  Top Layer w0.254: 1.25@31.428,33.215 35.365,33.215 v1(37.338,31.242)
  Bottom Layer w0.254: v1(37.338,31.242) 37.338,29.21 38.1,28.448 Recv.12
RadioRecv_TX: 1.51 Recv.14 | length 26.3
  Top Layer w0.254: 1.51@19.625,35.721 v1(21.116,35.721)
  Bottom Layer w0.254: v1(21.116,35.721) 21.116,33.262 28.471,25.908 Recv.14
RearLine_RX: 1.54 RearLine.3 | length 41.5
  Top Layer w0.254: 1.54@19.625,34.221 21.402,34.221 22.232,35.052 27.679,35.052 44.262,51.635 45.412,51.635 v1(45.72,51.943)
  Bottom Layer w0.254: v1(45.72,51.943) 45.72,56.261 RearLine.3
RearLine_TX: 1.53 RearLine.2 | length 38.7
  Top Layer w0.254: 1.53@19.625,34.721 21.259,34.721 22.044,35.506 27.491,35.506 44.756,52.771 46.421,52.771 v1(46.863,53.213)
  Bottom Layer w0.254: v1(46.863,53.213) 46.863,54.864 RearLine.2
RearServo_Ctrl: 1.42 Rear.Ctrl | length 19
  Top Layer w0.254: v1(23.241,44.577) 23.241,44.069 24.78,42.53 1.42@24.78,38.87
  Bottom Layer w0.254: Rear.Ctrl 23.241,50.546 v1(23.241,44.577)
ServoX1_Ctrl: 1.40 X1.Ctrl | length 17.1
  Top Layer w0.254: v1(24.911,44.577) 24.911,44.066 25.78,43.196 1.40@25.78,38.87
  Bottom Layer w0.254: v1(24.911,44.577) 24.911,45.44 24.511,45.84 24.511,53.467 25.019,53.975 X1.Ctrl
ServoX2_Ctrl: 1.39 X2.Ctrl | length 17.7
  Top Layer w0.254: v1(25.654,44.577) 25.654,44.212 26.28,43.585 1.39@26.28,38.87
  Bottom Layer w0.254: v1(25.654,44.577) 25.654,52.619 X2.Ctrl
SYS_SWCLK: 1.49 SWD.2 | length 13.4
  Top Layer w0.254: SWD.2 v1(11.176,31.762) ; v1(17.78,36.703) 1.49@19.607,36.703
  Bottom Layer w0.254: v1@11.188,31.762 14.224,34.798 15.875,34.798 v1(17.78,36.703)
SYS_SWDIO: 1.46 SWD.3 | length 22.7
  Top Layer w0.254: SWD.3 v1(9.779,30.746) ; v1(9.779,36.83) 10.287,37.338 22.352,37.338 22.78,37.766 1.46@22.78,38.87
  Bottom Layer w0.254: v1(9.779,30.746) v1(9.779,36.83)
UartX1_RX: 1.15 X1.3 | length 41.3
  Top Layer w0.254: 1.15@28.78,27.067 28.78,29.034 v1(29.337,29.591) ; v1(32.258,43.053) 32.258,49.777 35.567,53.086 v1(36.322,53.086)
  Bottom Layer w0.254: v1(29.337,29.591) 29.337,29.972 26.489,32.82 26.489,34.662 32.258,40.431 v1(32.258,43.053) ; v1(36.322,53.086) 36.322,58.039 37.211,58.928 X1.3
UartX1_TX: 1.14 X1.2@40.386,56.388 | length 37.8
  Top Layer w0.254: 1.14@28.28,27.067 28.28,29.394 v1(28.575,29.689) ; v1(31.496,43.053) 31.496,49.403 31.369,49.53 35.775,53.936 35.789,53.936 38.241,56.388 X1.2@40.386,56.388
  Bottom Layer w0.254: v1(28.575,29.689) 28.575,30.092 26.035,32.632 26.035,34.85 31.496,40.311 v1(31.496,43.053)
pads on no net: 1.1 1.2 1.3 1.4 1.7 1.10 1.11 1.20 1.24 1.28 1.44 1.45 1.50 1.52 1.62 Gyro.0 Gyro.ADO Gyro.ECL Gyro.EDA Gyro.FSYNC Gyro.INT Gyro.NCS Recv.3 Recv.4 Recv.5 Recv.6 Recv.7 Recv.8 Recv.9 Recv.10 Recv.11 Recv.13 Recv.15 Recv.16 Recv.17 Recv.18 Recv.19 Recv.20 RPi.3 RPi.5 RPi.7 RPi.11 RPi.12 RPi.13 RPi.15 RPi.16 RPi.17 RPi.18 RPi.19 RPi.21 RPi.22 RPi.23 RPi.24 RPi.26 RPi.27 RPi.28 RPi.29

## Polygon pours and split planes (outlines as drawn)
GND on Bottom Layer "Bottom Layer-GND" (solid, remove dead copper, pour order 4): 3.556,70.739 65.405,70.739 65.405,17.272 3.556,17.272
no net on Bottom Layer "Bottom Layer-No Net" (solid, remove dead copper, pour order 6): 3.556,17.272
GND on Top Layer "Top Layer-GND" (solid, remove dead copper, pour order 0): 65.405,70.739 3.556,70.739 3.556,16.764 4.064,17.272 65.659,17.145

## Silkscreen, mask and mechanical layers (free items; w line width, h text height)
Top Overlay:
  text "1" at 10.795,64.389 h0.89 r90
  text "3" at 13.335,64.262 h0.89 r90
  text "5" at 15.875,64.262 h0.89 r90
  text "7" at 18.415,64.262 h0.89 r90
  text "9" at 20.955,64.262 h0.89 r90
  text "11" at 23.505,63.768 h0.89 r90
  text "13" at 26.045,63.768 h0.89 r90
  text "15" at 28.585,63.768 h0.89 r90
  text "17" at 31.125,63.768 h0.89 r90
  text "19" at 33.665,63.768 h0.89 r90
  text "21" at 36.205,63.768 h0.89 r90
  text "23" at 38.745,63.768 h0.89 r90
  text "25" at 41.285,63.768 h0.89 r90
  text "27" at 43.825,63.768 h0.89 r90
  text "29" at 46.365,63.768 h0.89 r90
  text "31" at 48.905,63.768 h0.89 r90
  text "33" at 51.445,63.768 h0.89 r90
  text "35" at 53.985,63.768 h0.89 r90
  text "37" at 56.525,63.768 h0.89 r90
  text "39" at 59.065,63.768 h0.89 r90
  text "GND" at 4.064,63.5 h0.8
  text "GND  RX  TX  3V3" at 50.165,62.357 h0.6 r270
  text "GND SDA SCL 3V3" at 65.024,62.357 h0.6 r270
  text "Servos" at 21.209,52.832 h0.8
  text "I2C_Dist" at 58.674,51.562 h0.8
  text "GND" at 4.191,50.8 h0.8
  text "3V3 7V 7V 5V" at 9.652,50.054 h0.8 r270
  text "babocar" at 17.78,46.244 h3
  text "GND SDA SCL 3V3" at 48.555,44.45 h0.6 r270
  text "TX RX" at 4.699,36.465 h0.8
  text "3V3 CLK DIO GND" at 10.033,34.81 h0.6 r270
Mechanical 1:
  the board outline again, w0.5